# EAGLE board OctoWatchScheme (EAGLE 9.6.2)
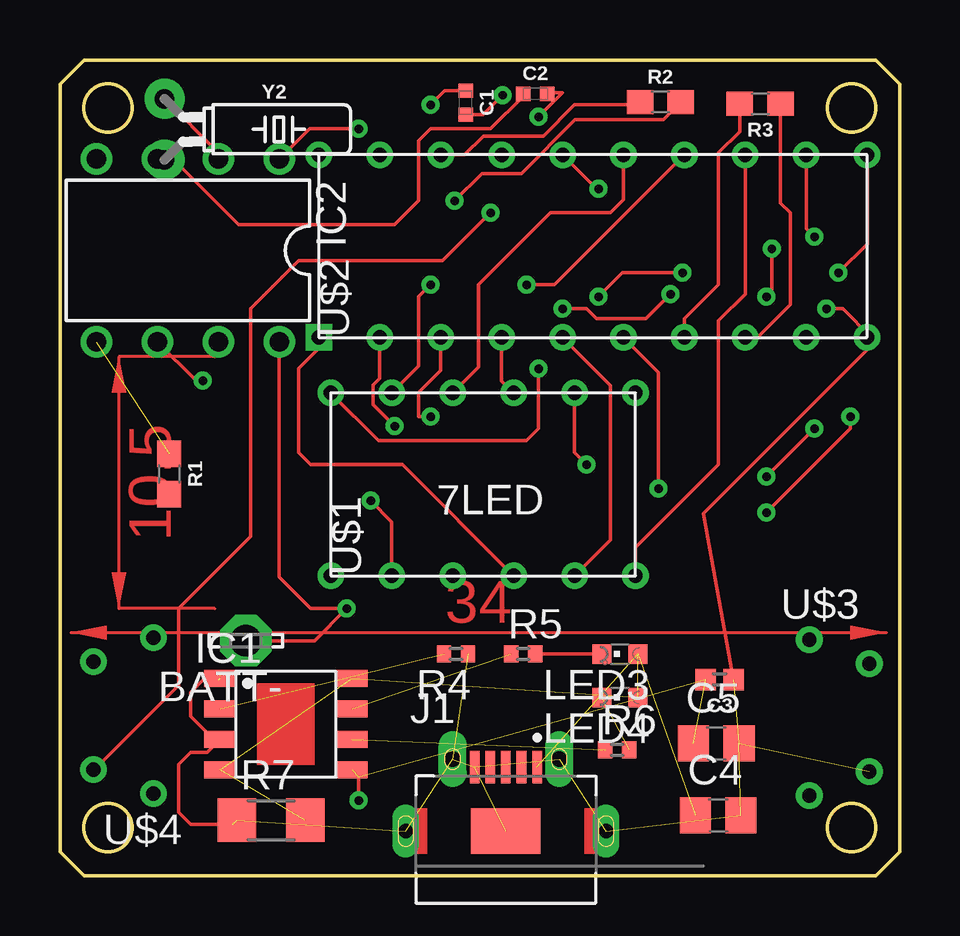
[diagram p0: board, top side]
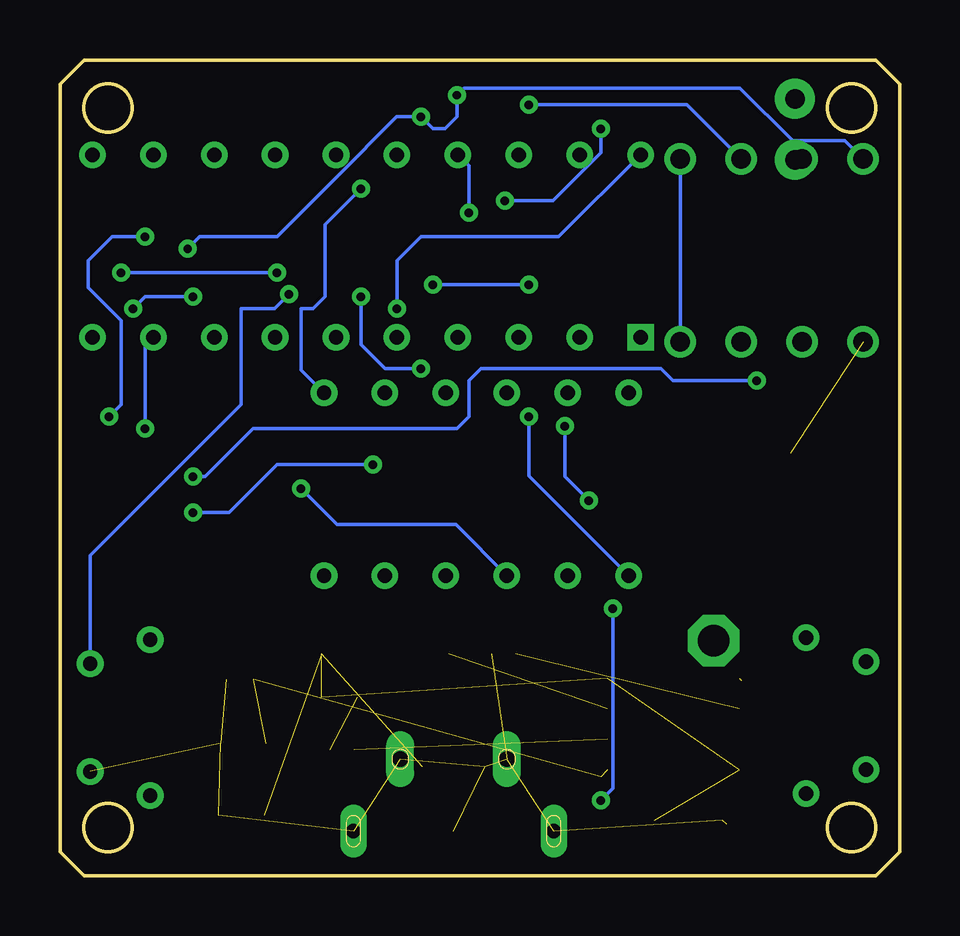
[diagram p1: board, bottom side, seen from below]

Size 35 x 34 mm. Coordinates in mm from the lower left corner, seen from the top.
Outline: 0,33 0,1 1,0 34,0 35,1 35,33 34,34 1,34 0,33
Outline: circle at 2,32 radius 1
Outline: circle at 33,32 radius 1
Outline: circle at 2,2 radius 1
Outline: circle at 33,2 radius 1
Copper layers (1*16): Top 0.035mm / dielectric 1.5mm / Bottom 0.035mm
Design rules "default": minimum track width 6mil, minimum drill 0.35mm, track to track 6mil, track to pad 6mil, pad to pad 6mil, via to via 6mil, smd to smd 6mil, copper to edge 40mil, drill to drill 6mil, minimum pad ring 10mil, minimum via ring 8mil, stop-mask expansion 4mil, vias tented up to drill 0mil, thermal gap 10mil

## Footprints (pad centres in the part's own frame; a part is rotated, then mirrored left to right if it is on the bottom)
LSP13 = drill 1.321 pad 2.159 octagon: MP 0,0
0402-TIGHT = smd 0.6 x 0.6: 1 -0.5,0; 2 0.5,0
0402 = smd 0.85 x 0.9: 1 -0.58,0; 2 0.58,0
C0805 = smd 1.3 x 1.5: 1 -0.95,0; 2 0.95,0
SOP-8 = smd 1.3 x 0.7: 1 -2.75,1.905; 2 -2.75,0.635; 3 -2.75,-0.635; 4 -2.75,-1.905; 5 2.75,-1.905; 6 2.75,-0.635; 7 2.75,0.635; 8 2.75,1.905
DIL08 = drill 0.813: -RST 3.81,3.81; GND 3.81,-3.81; I/O 1.27,3.81; SCLK -1.27,3.81; VCC1 -3.81,3.81; VCC2 -3.81,-3.81; X1 -1.27,-3.81; X2 1.27,-3.81
0475900001 = smd 0.4 x 1.35: 1 1.3,2.675; 2 0.65,2.675; 3 0,2.675; 4 -0.65,2.675; 5 -1.3,2.675 | drill 0.65 pad 0.85 long: SH1 -2.225,3; SH2 2.225,3 | drill 0.6 pad 0.8 long: SH3 -4.175,0; SH4 4.175,0 | smd 2.9 x 1.9: SH5 0,0
CHIPLED_0603 = smd 0.8 x 0.8: A 0,-0.75; C 0,0.75
0603 = smd 1.1 x 1: 1 -0.85,0; 2 0.85,0
R0402 = smd 0.6 x 0.7: 1 -0.5,0; 2 0.5,0
R1206 = smd 1.6 x 1.803: 1 -1.422,0; 2 1.422,0
LED_SEGMENT = drill 0.6: P$1 -12.7,7.62; P$2 -12.7,5.08; P$3 -12.7,2.54; P$4 -12.7,0; P$5 -12.7,-2.54; P$6 -12.7,-5.08; P$7 -5.08,7.62; P$8 -5.08,5.08; P$9 -5.08,2.54; P$10 -5.08,0; P$11 -5.08,-2.54; P$12 -5.08,-5.08
STC15F204AE = drill 0.6 square: P$1 -35.56,7.62 | drill 0.6: P$2 -35.56,5.08; P$3 -35.56,2.54; P$4 -35.56,0; P$5 -35.56,-2.54; P$6 -35.56,-5.08; P$7 -35.56,-7.62; P$8 -35.56,-10.16; P$9 -35.56,-12.7; P$10 -35.56,-15.24; P$11 -27.94,7.62; P$12 -27.94,5.08; P$13 -27.94,2.54; P$14 -27.94,0; P$15 -27.94,-2.54; P$16 -27.94,-5.08; P$17 -27.94,-7.62; P$18 -27.94,-10.16; P$19 -27.94,-12.7; P$20 -27.94,-15.24
BUTTON = drill 0.6: P$1 -9,4.5; P$2 -9,0; P$3 -11.5,-1; P$4 -11.5,5.5
CRYSTAL-PTH-2X6-CYL = drill 0.813 pad 1.676: 1 -1.27,0; 2 1.27,0

## Placement (x,y rotation side)
BATT-  LSP13  [LSP13]  7.75,9.79 180 top
C1  22pF  [0402-TIGHT]  16.91,32.22 270 top
C2  22pF  [0402-TIGHT]  19.82,32.59 0 top
C3  0.1uF  [0402]  27.5,8.17 180 top
C4  10uf  [C0805]  27.44,2.51 0 top
C5  10uf  [C0805]  27.36,5.51 0 top
IC1  TP4056  [SOP-8]  9.42,6.31 0 top
IC2  DS1302  [DIL08]  5.33,26.06 180 top
J1  0475900001  [0475900001]  18.59,1.85 0 top
LED3  [CHIPLED_0603]  23.34,9.23 90 top
LED4  [CHIPLED_0603]  23.34,7.42 90 top
R1  10k  [0603]  4.56,16.74 270 top
R2  10k  [0603]  25.03,32.24 0 top
R3  10k  [0603]  29.19,32.17 180 top
R4  122  [R0402]  16.51,9.24 180 top
R5  102  [R0402]  19.31,9.24 0 top
R6  102  [R0402]  23.23,5.24 0 top
R7  104  [R1206]  8.8,2.31 0 top
U$1  [LED_SEGMENT]  18.91,25.2 90 top
U$2  [STC15F204AE]  18.41,57.99 90 top
U$3  BUTTON  [BUTTON]  42.74,4.34 0 top
U$4  BUTTON  [BUTTON]  -7.6,8.92 180 top
Y2  32.768kHz  [CRYSTAL-PTH-2X6-CYL]  4.36,31.11 270 top

## Library data of the parts
BATT- = solpad
C1 C2 = SparkFun-Capacitors; PROD_ID: CAP-14674
C3 = SparkFun-Capacitors; PROD_ID: CAP-14993
C4 C5 = rcl; SPICEPREFIX: C
IC1 = TP4056
IC2 = ds1302
J1 = USB connector; CREATED_BY: PCBLayout.com; DIGIKEY_PARTNO: WM17144TR-ND; MANUFACTURER: Molex; MPN: 0475900001
LED3 LED4 = adafruit
R1-R3 = SparkFun-Resistors; PROD_ID: RES-00824
R4-R7 = rcl; SPICEPREFIX: R
U$1-U$4 = OctoWatch
Y2 = SparkFun-Clocks; PROD_ID: XTAL-10112

## Nets
GND: C1.2 C2.2 C3.1 C4.2 C5.2 IC1.1 IC1.3 IC2.GND J1.5 J1.SH1 J1.SH2 J1.SH3 J1.SH4 J1.SH5 R4.1 R7.1 U$2.P$10 U$3.P$2
N$1: U$1.P$1 U$2.P$3
N$2: U$1.P$2 U$2.P$2
N$3: U$1.P$4 U$2.P$1
N$4: U$1.P$3 U$2.P$6
N$5: U$1.P$5 U$2.P$5
N$6: U$1.P$6 U$2.P$18
N$7: U$1.P$7 U$2.P$20
N$8: U$1.P$8 U$2.P$17
N$9: U$1.P$9 U$2.P$16
N$10: U$1.P$10 U$2.P$4
N$11: U$1.P$11 U$2.P$19
N$12: U$1.P$12 U$2.P$15
N$13: C1.1 IC2.X1 Y2.1
N$14: U$4.P$2
N$15: C2.1 IC2.X2 Y2.2
N$16: IC2.I/O U$2.P$9
N$17: IC2.-RST R1.1
N$18: R1.2
N$19: U$2.P$14 U$4.P$1
N$21: U$2.P$12
N$23: R2.1 U$2.P$13
N$24: R3.2 U$2.P$7
N$25: R3.1 U$2.P$8
N$26: IC1.6 R6.1
N$27: LED4.C R6.2
N$28: IC1.7 R5.1
N$29: LED3.C R5.2
N$30: U$2.P$11 U$3.P$1
N$31: IC1.2 R4.2
N$32: C4.1 IC1.4 IC1.8 J1.1 LED3.A LED4.A R7.2
VCC: BATT-.MP C3.2 C5.1 IC1.5 IC2.VCC1 IC2.VCC2 R2.2

## Tracks (layer width: path | path; a pad name or v marks a point on that pad's centre or on a via)
GND  (via drill 0.35)  (13 unrouted)
  Top 0.152: 33.65,21.93 U$2.P$10 | 33.65,21.93 26.82,15.1 C3.1 | 6.59,8.13 5.95,8.13 5.45,7.63 5.45,6.63 6.41,5.68 IC1.3 6.12,5.13 5.45,5.13 4.95,4.63 4.95,2.63 5.45,2.13 7.2,2.13 | v19.95,31.63 20.95,32.63 20.36,32.63 C2.2 | v18.45,32.53 17.64,31.72 C1.2 | v29.68,26.13 29.68,24.36 v29.45,24.13 | v31.95,23.63 32.63,23.63 33.83,22.43 33.83,22.11 33.65,21.93
  Bottom 0.152: IC2.GND 2.28,30.63 4.45,30.63 6.65,32.83 18.15,32.83 v18.45,32.53 18.45,31.63 18.95,31.13 19.45,31.13 v19.95,31.63 20.98,31.63 22.23,30.37 22.23,30.35 25.95,26.63 29.18,26.63 v29.68,26.13 | v29.45,24.13 31.45,24.13 v31.95,23.63
N$1  (via drill 0.35)
  Top 0.152: U$2.P$3 15.87,21.05 14.95,20.13 14.95,19.13 v15.45,19.13
  Bottom 0.152: v15.45,19.13 15.45,16.66 U$1.P$1
N$2  (via drill 0.35)
  Top 0.152: U$2.P$2 13.33,20.73 13.05,20.44 13.05,19.64 v13.95,18.74 | v12.95,15.63 13.83,14.75 U$1.P$2
  Bottom 0.152: v13.95,18.74 13.95,16.63 v12.95,15.63
N$3
  Top 0.152: U$1.P$4 14.28,17.13 10.45,17.13 9.95,17.63 9.95,21.13 10.79,21.97 U$2.P$1
N$4  (via drill 0.35)
  Top 0.152: U$2.P$6 24.95,20.97 v24.95,16.13
  Bottom 0.152: v24.95,16.13 23.45,14.63 18.5,14.63 U$1.P$3
N$5
  Top 0.152: U$2.P$5 22.95,20.43 22.95,14 U$1.P$5
N$6
  Top 0.152: U$2.P$18 28.57,24.25 27.45,23.13 27.45,17.13 23.99,13.67 U$1.P$6
N$7  (via drill 0.35)
  Top 0.152: U$2.P$20 33.65,26.33 v32.45,25.13 | v25.95,25.13 23.45,25.13 v22.45,24.13 | v19.95,21.13 19.95,18.63 19.45,18.13 13.28,18.13 U$1.P$7
  Bottom 0.152: v32.45,25.13 v25.95,25.13 | v22.45,24.13 22.45,22.13 21.45,21.13 v19.95,21.13
N$8  (via drill 0.35)
  Top 0.152: U$2.P$17 20.61,24.63 v19.45,24.63 | v15.45,24.63 14.95,24.13 14.95,21.24 U$1.P$8
  Bottom 0.152: v19.45,24.63 v15.45,24.63
N$9
  Top 0.152: U$1.P$9 17.45,21.2 17.45,24.63 20.45,27.63 22.95,27.63 23.49,28.17 U$2.P$16
N$10
  Top 0.152: U$2.P$4 18.41,20.62 U$1.P$10
N$11  (via drill 0.35)
  Top 0.152: U$2.P$19 31.11,26.97 v31.45,26.63 | v21.95,17.13 21.45,17.63 U$1.P$11 | v32.95,19.13 32.95,18.63 v29.45,15.13
  Bottom 0.152: v31.45,26.63 32.83,26.63 33.83,25.63 33.83,24.51 32.45,23.13 32.45,19.63 v32.95,19.13 | v29.45,15.13 27.95,15.13 25.95,17.13 v21.95,17.13
N$12  (via drill 0.35)
  Top 0.152: v22.45,28.63 22.37,28.63 U$2.P$15
  Bottom 0.152: v22.45,28.63 23.95,27.13 23.95,24.13 24.45,23.63 24.95,23.63 24.95,21.08 U$1.P$12
N$13  (via drill 0.35)
  Top 0.152: Y2.1 6.6,30.14 IC2.X1 | v15.45,32.13 16.04,32.72 C1.1
  Bottom 0.152: IC2.X1 8.86,32.13 13.95,32.13 v15.45,32.13
N$15
  Top 0.152: Y2.2 4.09,29.84 IC2.X2 4.71,29.87 7.45,27.13 13.95,27.13 14.95,28.13 14.95,30.63 15.45,31.13 17.95,31.13 19.32,32.5 C2.1
N$16  (via drill 0.35)
  Top 0.152: IC2.I/O 5.68,20.63 v5.95,20.63 | v29.45,16.63 v31.45,18.63
  Bottom 0.152: v5.95,20.63 9.45,20.63 9.95,21.13 17.45,21.13 17.95,20.63 17.95,19.13 18.45,18.63 26.95,18.63 28.95,16.63 v29.45,16.63 | v31.45,18.63 31.45,22.09 U$2.P$9
N$17  (1 unrouted)
N$19  (via drill 0.35)
  Top 0.152: v17.95,27.63 15.95,25.63 9.95,25.63 7.95,23.63 7.95,14.13 4.95,11.13 4.95,7.92 1.45,4.42 | 1.74,4.42 1.45,4.42 | 1.45,4.42 U$4.P$1
  Bottom 0.152: U$2.P$14 17.95,29.59 v17.95,27.63
N$23
  Top 0.152: U$2.P$13 16.87,30.05 17.65,30.83 20.15,30.83 21.45,32.13 24.07,32.13 R2.1
N$24
  Top 0.152: R3.2 28.34,31.02 27.45,30.13 27.45,24.63 26.03,23.21 U$2.P$7
N$25
  Top 0.152: U$2.P$8 29.07,22.43 30.45,23.81 30.45,27.63 30.04,28.04 R3.1 30.36,32.17 30.45,32.08
N$26  (1 unrouted)
N$27  (1 unrouted)
N$28  (1 unrouted)
N$29
  Top 0.152: LED3.C R5.2
N$30  (via drill 0.35)
  Top 0.152: v20.95,23.63 21.95,23.63 22.37,23.21 24.43,23.21 v25.45,24.24
  Bottom 0.152: U$2.P$11 14.21,26.63 19.95,26.63 20.95,25.63 v20.95,23.63 | v25.45,24.24 26.06,23.63 27.45,23.63 27.45,19.63 33.74,13.34 U$3.P$1
N$31  (1 unrouted)
N$32  (6 unrouted)
VCC  (via drill 0.35)  (3 unrouted)
  Top 0.152: R2.2 25.15,31.51 21.48,31.51 19.23,29.27 17.59,29.27 v16.45,28.13 | v12.45,31.13 10.4,31.13 IC2.VCC2 | IC2.VCC1 9.14,12.44 10.45,11.13 v11.95,11.13 10.61,9.79 BATT-.MP | v12.45,3.13 12.45,4.12
  Bottom 0.152: v16.45,28.13 14.45,28.13 12.45,30.13 v12.45,31.13 | IC2.VCC1 IC2.VCC2 | v11.95,11.13 11.95,3.63 v12.45,3.13
(copper drawn outside any net)
  shapes: Top area x2